# Altium PCB Power.PcbDoc
Units mm, origin at the board's own origin, x right, y up, seen from the top; angles counter-clockwise.
Board outline 80.25 x 60.25 mm, 2 copper layers (Top Layer, Bottom Layer); 57 components, 37 nets, 186 pads, 63 vias.
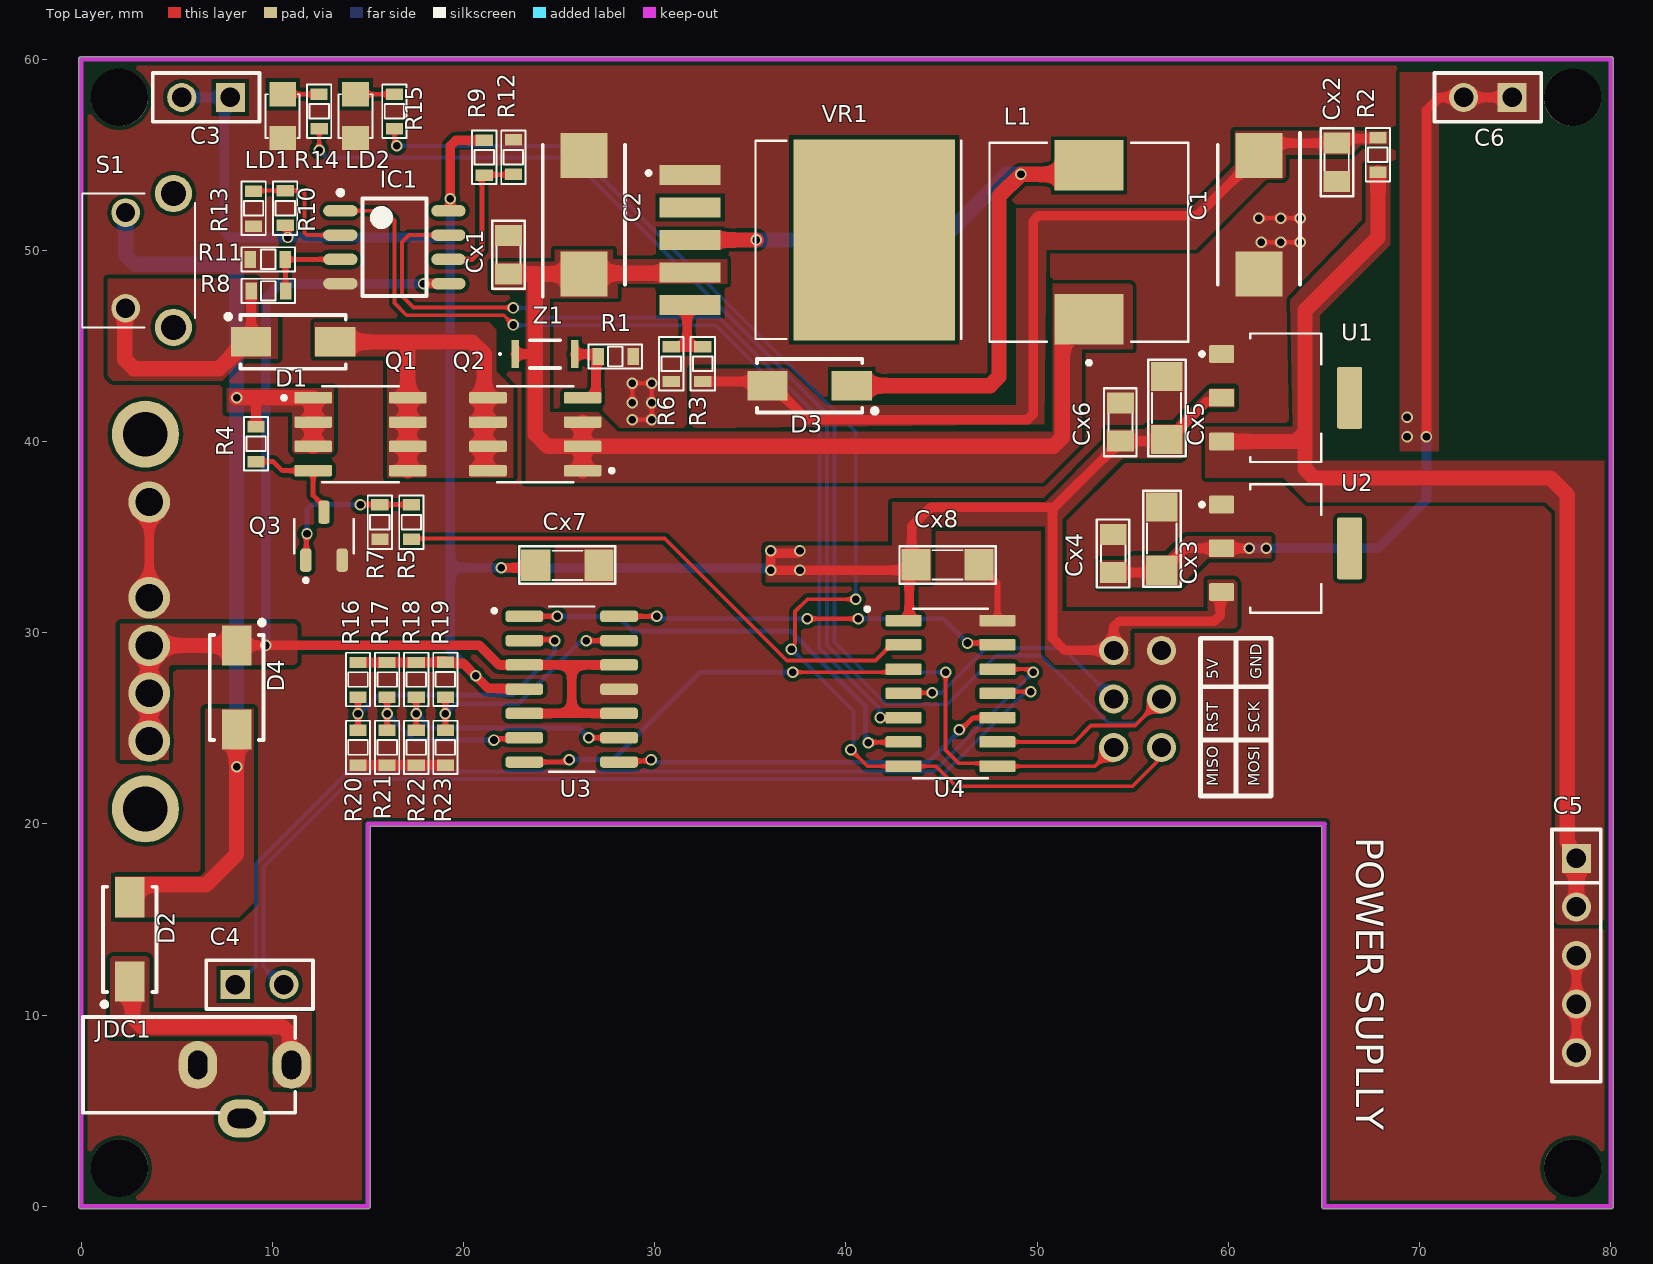
[diagram p0: Top Layer view]
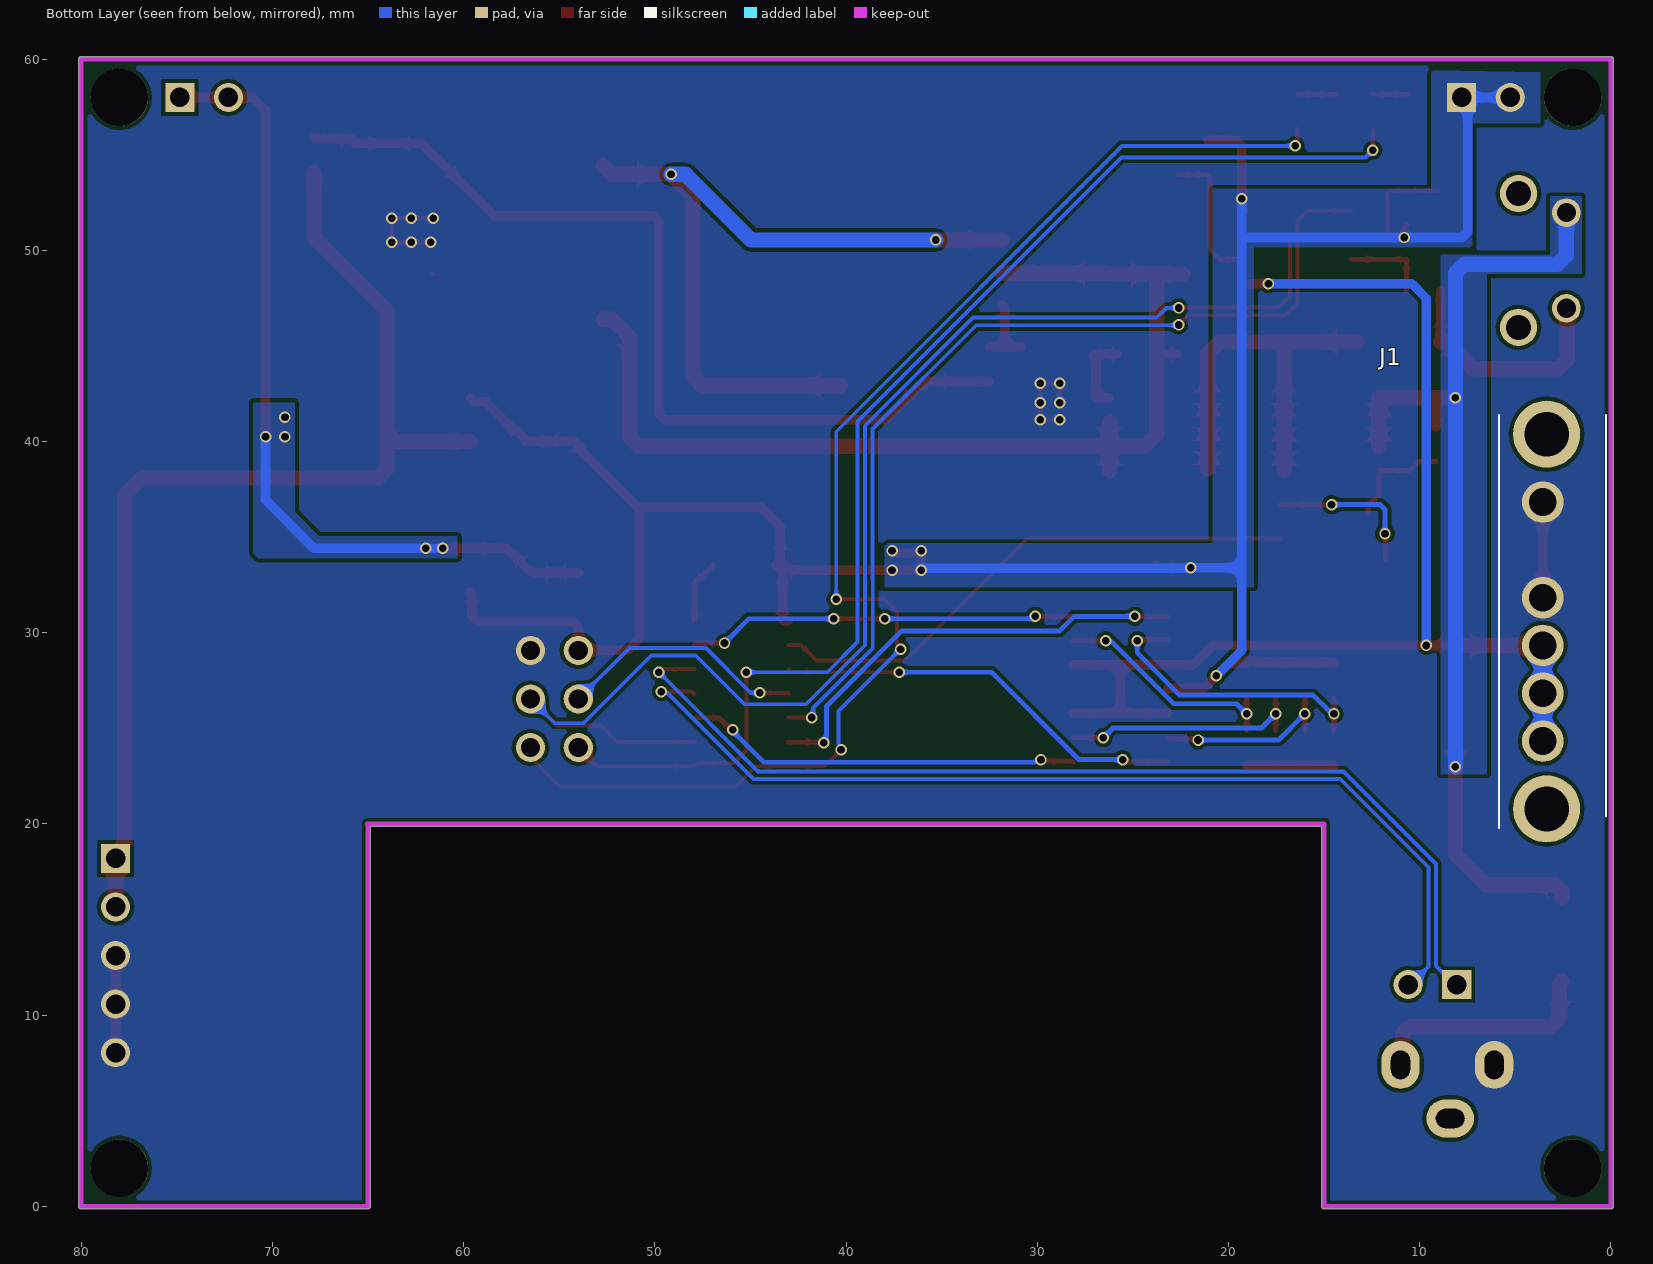
[diagram p1: Bottom Layer view, seen from below]
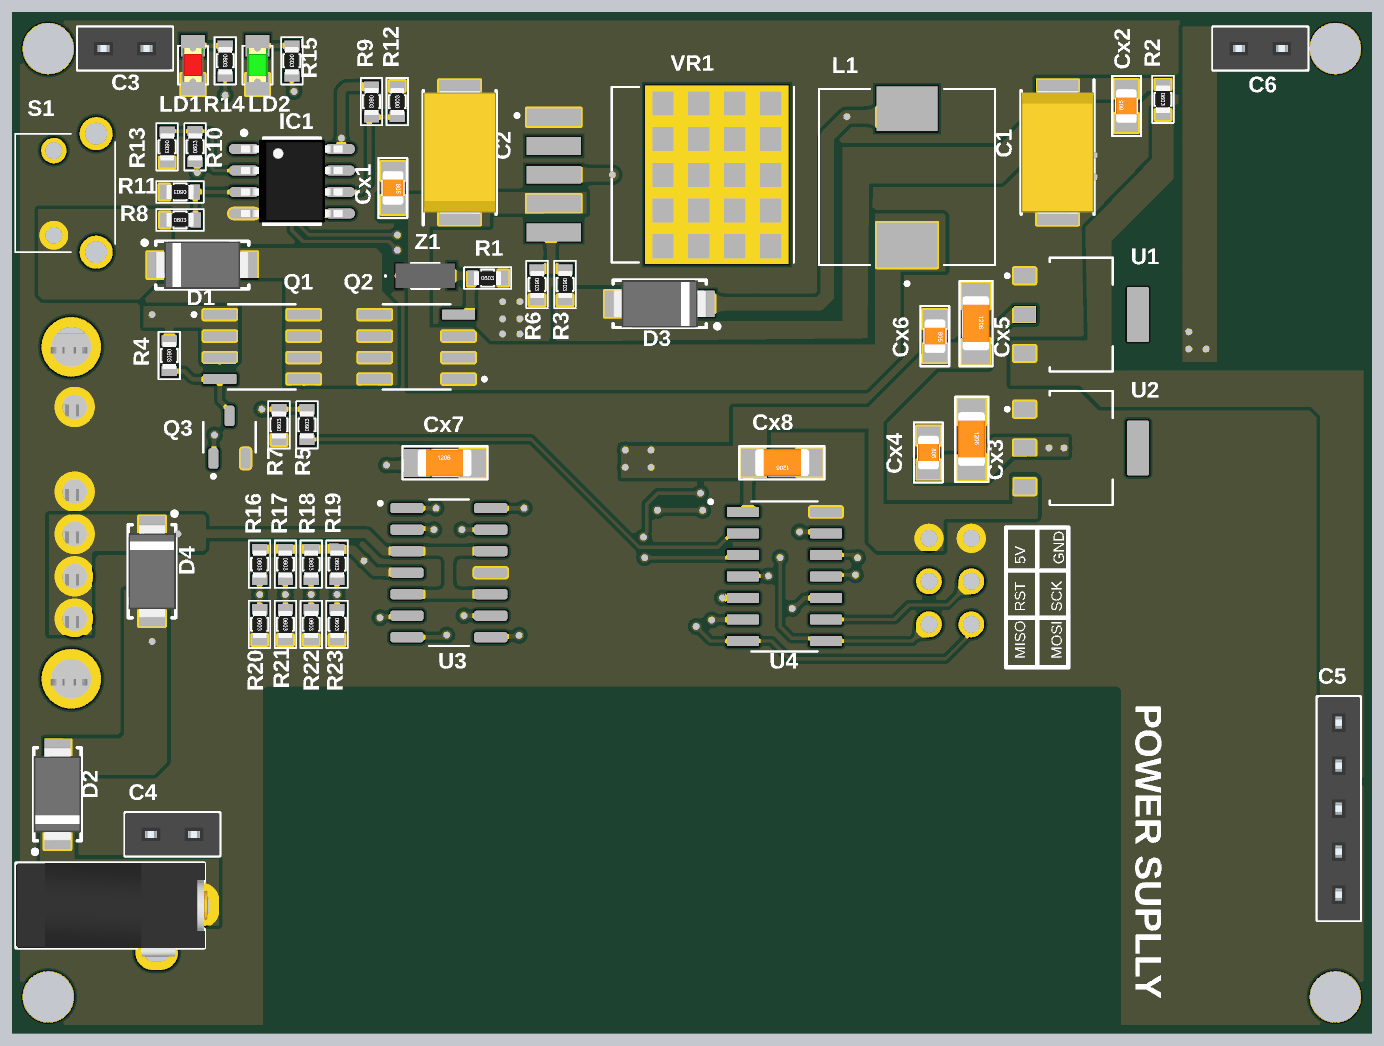
[diagram p2: 3D render of the assembled board from above, using the file's embedded part models]

## Layer stack, top to bottom
Top Solder: solder mask 0.0102, Solder Resist, Dk 3.5
Top Layer: signal copper 0.0356
Dielectric 1: dielectric 0.32, FR-4, Dk 4.8
Bottom Layer: signal copper 0.0356
Bottom Solder: solder mask 0.0102, Solder Resist, Dk 3.5

## Board outline
0,-0.127 cw(c0,0) -0.127,0 -0.127,60 cw(c0,60) 0,60.127 80,60.127 cw(c80,60) 80.127,60 80.127,0 cw(c80,0) 80,-0.127 65.024,-0.127 cw(c65.024,0) 65.012,-0.127 cw(c65,0) 64.873,0 64.873,19.873 15.127,19.873 15.127,0 cw(c15,0) 15,-0.127

## Design rules (kind name [scope] priority, off if disabled: settings)
Clearance [All] p1: gap=0.2 ignorepadtopadclearanceinfootprint=FALSE
PlaneClearance [All] p1: clearance=0.5
PlaneConnect [All] p1: planeconnectstyle=Direct reliefexpansion=0.508 reliefentries=4 reliefconductorwidth=0.254 reliefairgap=0.254
PolygonConnect [All] p1: connectstyle=Direct reliefconductorwidth=0.254 reliefentries=4 polygonreliefangle="90 Angle" airgapwidth=0.254
RoutingVias [All] p1: holewidth=0.4 width=0.6 viastyle="Through Hole" minholewidth=0.4 minwidth=0.6 maxholewidth=0.4 maxwidth=0.6
SolderMaskExpansion [All] p1: expansion=0.102 istentingtop=FALSE
Width [InNetClass('TP_PINT')] p1: maxlimit=0.8 minlimit=0.5 preferedwidth=0.6
Width 9V [InNetClass('9V')] p2: maxlimit=0.8 minlimit=0.5 preferedwidth=0.6
Width VCC [InNetClass('VCC')] p3: maxlimit=0.5 minlimit=0.3 preferedwidth=0.4
Width P_IN [InNetClass('P_INPUT')] p4: maxlimit=0.8 minlimit=0.5 preferedwidth=0.6
Width MCU [InNetClass('MCU')] p5: maxlimit=0.2 minlimit=0.2 preferedwidth=0.2
Width gnd [InNetClass('gnd')] p6: maxlimit=0.5 minlimit=0.2 preferedwidth=0.3
28 further rules are at their usual default settings.

## Classes and differential pairs
net class gnd: GND
net class VCC: +5 VCC
net class TP_PINT: TP_PINT1 TP_PINT3
net class P_INPUT: +BAT EX
net class MCU: CRL_P MISO MOSI/SDA R_SW_Power RST SCK/SCL TP1 TP_SW U_RX U_TX
net class 9V: +9 NetC1_1 NetC2_1 NetD3_1 NetQ2_4 TP_FB TP_PINT3

## Components (designator, comment, footprint, x,y, rotation, side; value= is the part's Value field where it differs from the comment)
C1 "100uf 16V" CAPPM7343X310N 61.595,51.868 r270 top
C2 "100uf 16V" CAPPM7343X310N 26.289,51.868 r90 top
C3 "JP2" JP2-C1T 7.8,58 r180 top locked
C4 "JP2" JP2-C1T 8.06,11.6 r0 top locked
C5 "JP5" JP5-C1T 78.2,18.2 r270 top locked
C6 "JP2" JP2-C1T 74.84,58 r180 top locked
Cx1 "104" CN-SMD-0805 22.352,49.768 r270 top value=33pF
Cx2 "104" CN-SMD-0805 65.659,54.61 r90 top value=33pF
Cx3 "22uf 10v" CN-SMD-1206 56.515,34.95 r270 top value=33pF
Cx4 "104" CN-SMD-0805 53.975,34.147 r270 top value=33pF
Cx5 "22uf 10v" CN-SMD-1206 56.769,41.783 r270 top value=33pF
Cx6 "104" CN-SMD-0805 54.356,41.021 r270 top value=33pF
Cx7 "22uf 10v" CN-SMD-1206 25.4,33.528 r0 top value=33pF
Cx8 "22uf 10v" CN-SMD-1206 45.339,33.553 r180 top value=33pF
D1 "D Schottky" SS34 11.09,45.212 r0 top
D2 "D Schottky" SS34 2.54,13.97 r90 top
D3 "D Schottky" SS34 38.1,42.926 r180 top
D4 "D Schottky" SS34 8.128,27.137 r270 top
IC1 "LM358" SO8 16.383,50.165 r0 top
J1 "9-1612503-1" 916125031 3.556,24.337 r90 bottom
JDC1 "Jac DC" DC3 11,7.4 r0 top locked
L1 "47uh 3A" IND_#B952AS-H-470M=P3 52.705,50.419 r90 top
LD1 "LED" LED-0805-Red 10.541,58.166 r270 top value="LED 3 - 5 ly 2 Colour" (schematic designator LED1)
LD2 "LED" LED-0805-Green 14.351,58.166 r270 top value="LED 3 - 5 ly 2 Colour" (schematic designator LED2)
Q1 "AO4407A" SOIC127P600X175-8N 14.605,40.386 r0 top
Q2 "AO4407A" SOIC127P600X175-8N 23.749,40.386 r180 top
Q3 "AO3400A" SOT95P280X125-3N 12.7,35.052 r90 top
R1 "10k" RES-SMD-0603 27.94,44.45 r0 top
R2 "0R" RES-SMD-0603 67.818,55.004 r270 top
R3 "62K" RES-SMD-0603 32.512,44.069 r270 top
R4 "10k" RES-SMD-0603 9.144,39.878 r270 top
R5 "220R" RES-SMD-0603 17.272,35.776 r90 top
R6 "10K" RES-SMD-0603 30.861,44.069 r270 top
R7 "10k" RES-SMD-0603 15.621,35.776 r90 top
R8 "10k" RES-SMD-0603 9.779,47.879 r0 top
R9 "180R" RES-SMD-0603 21.082,54.864 r270 top
R10 "1k2" RES-SMD-0603 10.668,52.197 r90 top
R11 "10k" RES-SMD-0603 9.779,49.53 r180 top
R12 "500R" RES-SMD-0603 22.606,54.864 r90 top
R13 "330R" RES-SMD-0603 9.017,52.197 r270 top
R14 "330R" RES-SMD-0603 12.446,57.277 r270 top
R15 "330R" RES-SMD-0603 16.383,57.277 r270 top
R16 "220R" RES-SMD-0603 14.478,27.557 r270 top
R17 "500R" RES-SMD-0603 16.002,27.557 r270 top
R18 "2k2" RES-SMD-0603 17.526,27.557 r270 top
R19 "220R" RES-SMD-0603 19.05,27.559 r270 top
R20 "570R" RES-SMD-0603 14.478,24.003 r270 top
R21 "1k5" RES-SMD-0603 16.002,24.003 r270 top
R22 "7k5" RES-SMD-0603 17.526,24.003 r270 top
R23 "1k" RES-SMD-0603 19.05,24.003 r270 top
S1 "MJTP1117" MJTP1117 2.326,51.974 r270 top
U1 "AMS1117-5.0" SOT229P700X180-4N 62.992,42.291 r270 top
U2 "AMS1117-3.3" SOT229P700X180-4N 62.992,34.417 r270 top
U3 "LM324DR" SOIC127P600X175-14N#1 25.654,27.051 r0 top
U4 "ATTINY44A-SSU" SOIC127P600X175-14N#2 45.466,26.83 r0 top
VR1 "XL6009" DPAK170P1435X465-6N 37.973,50.546 r0 top
Z1 "ZMM5V6" ZMM5V6 24.257,44.577 r180 top

## Footprints (in the part's own frame and the unit in brackets; to place one, negate y for a bottom-side part, rotate by r counter-clockwise, add the part's x,y. Pads: shape width x height; smd on the part's side, far side on the other; paste and mask are expansions set on the pad)
916125031 [mm]
  round 2.175 hole 1.45: 1(0,0) 2(2.5,0) 3(5,0) 4(7.5,0) 5(12.5,0)
  round 3.51 hole 2.34: MH1(-3.55,-0.2) MH2(16.05,-0.2)
  silkscreen extent -4.55,-3.3 17.05,2.3, body extent -4.75,-3.43 16.85,7.22, height 4.81
CAPPM7343X310N [mm]
  rect 2.35x2.45 smd: 1(-3.1,0) 2(3.1,0)
  silkscreen extent -4.28,-2.15 3.65,2.15, body extent -3.65,-2.15 3.65,2.15, height 3.1
CN-SMD-0805 [mm]
  rect 1.1x1.397 smd: 1(-1,0) 2(1,0)
  silkscreen extent -1.78,-0.86 1.78,0.84, body extent -1,-0.62 1,0.63, height 0.8
CN-SMD-1206 [mil]
  rect 60x65 smd: 1(-64,0) 2(66,0)
  silkscreen extent -98,-38 100,39, body extent -63,-31 63,32, height 40
DC3 [mm] "WR-DC_DC Power Jack_Right Angled_THT Center Pin ?1.0_Plug ID ?1.05_Plug OD ?3.5"
  oval 2x2.5 hole 1 slot 1.5 at 90 deg: 1(0,0) 2(-4.9,0)
  oval 2.5x2 hole 1 slot 1.5 at 0 deg: 3(-2.6,-2.8)
  silkscreen extent -10.9,-2.5 0.2,2.5, body extent -10.9,-3 0.4,2.5, height 7.81
DPAK170P1435X465-6N [mm]
  rect 3.21x1.05 smd: 1(-6.13,3.4) 2(-6.13,1.7) 3(-6.13,0) 4(-6.13,-1.7) 5(-6.13,-3.4)
  rect 8.46x10.53 smd paste-6: 6(3.5,0)
  silkscreen extent -8.4,-5.18 8.05,5.18
IND_#B952AS-H-470M=P3 [mm]
  rect 2.65x3.6 smd: 1(-4.025,0) 2(4.025,0)
  silkscreen extent -6.4,-5.2 5.2,5.2
JP2-C1T [mm] "2 row, straight, gold plating"
  rect 1.52x1.52 hole 1.02: 1(0,0)
  round 1.52 hole 1.02: 2(2.54,0)
  silkscreen extent -1.52,-1.27 4.06,1.27, body extent -1.52,-1.25 4.06,1.25, height 8.51
JP5-C1T [mm] "5 row, straight, gold plating"
  rect 1.52x1.52 hole 1.02: 1(0,0)
  round 1.52 hole 1.02: 2(2.54,0) 3(5.08,0) 4(7.62,0) 5(10.16,0)
  silkscreen extent -1.52,-1.27 11.68,1.27, body extent -1.52,-1.25 11.68,1.25, height 8.51
LED-0805-Green [mil]
  rect 50x55 smd: 1(0,0) 2(90,0)
  silkscreen extent 0,-35 90,35, body extent 5,-25 85,25, height 43
LED-0805-Red [mil]
  rect 50x55 smd: 1(0,0) 2(90,0)
  silkscreen extent 0,-35 90,35, body extent 5,-25 85,25, height 43
MJTP1117 [mm]
  round 1.5 hole 1: 1(0,0) 2(5,0)
  round 1.95 hole 1.3: 3(-1,2.5) 4(6,2.5)
  silkscreen extent -1,-2.27 6,3.63
RES-SMD-0603 [mm]
  rect 0.6x0.9 smd: 1(-0.889,0) 2(0.927,0)
  silkscreen extent -1.4,-0.64 1.4,0.64, body extent -0.8,-0.4 0.8,0.4, height 0.43
SO8 [mm] "SOIC, 8-Leads, Body 4.9x3.9mm, Pitch 1.27mm, IPC High Density"
  oval 1.8x0.6 smd: 1(-2.825,1.905) 2(-2.825,0.635) 3(-2.825,-0.635) 4(-2.825,-1.905) 5(2.825,-1.905) 6(2.825,-0.635) 7(2.825,0.635) 8(2.825,1.905)
  silkscreen extent -2.95,-2.55 1.68,2.98, body extent -2.99,-2.45 3,2.45, height 1.6
SOIC127P600X175-8N [mm]
  rrect25% 1.97x0.6 smd: 1(-2.475,1.905) 2(-2.475,0.635) 3(-2.475,-0.635) 4(-2.475,-1.905) 5(2.475,-1.905) 6(2.475,-0.635) 7(2.475,0.635) 8(2.475,1.905)
  silkscreen extent -4.1,-2.52 2,2.52
SOIC127P600X175-14N#1 [mm]
  rrect50% 1.97x0.6 smd: 1(-2.475,3.81) 2(-2.475,2.54) 3(-2.475,1.27) 4(-2.475,0) 5(-2.475,-1.27) 6(-2.475,-2.54) 7(-2.475,-3.81) 8(2.475,-3.81) 9(2.475,-2.54) 10(2.475,-1.27) 11(2.475,0) 12(2.475,1.27) 13(2.475,2.54) 14(2.475,3.81)
  silkscreen extent -4.15,-4.33 1.17,4.33
SOIC127P600X175-14N#2 [mm]
  rrect25% 1.9x0.6 smd: 1(-2.455,3.81) 2(-2.455,2.54) 3(-2.455,1.27) 4(-2.455,0) 5(-2.455,-1.27) 6(-2.455,-2.54) 7(-2.455,-3.81) 8(2.455,-3.81) 9(2.455,-2.54) 10(2.455,-1.27) 11(2.455,0) 12(2.455,1.27) 13(2.455,2.54) 14(2.455,3.81)
  silkscreen extent -4.45,-4.43 1.95,4.51
SOT95P280X125-3N [mm]
  rrect50% 1.21x0.59 smd: 1(-1.255,0.95) 2(-1.255,-0.95) 3(1.255,0)
  silkscreen extent -2.41,-1.55 0.9,1.55
SOT229P700X180-4N [mm]
  rrect15% 0.93x1.31 smd: 1(-2.29,-3.345) 2(0,-3.345) 3(2.29,-3.345)
  rrect15% 3.24x1.31 smd: 4(0,3.345)
  silkscreen extent -3.36,-4.47 3.36,1.86
SS34 [mm]
  rect 2.1x1.55 smd: 1(-2.2,0) 2(2.2,0)
  silkscreen extent -3.52,-1.4 2.75,1.45, body extent -2.75,-1.4 2.75,1.4, height 2.3
ZMM5V6 [mm]
  rect 0.39x1.45 smd: 1(1.555,0) 2(-1.555,0)
  silkscreen extent -0.8,-0.72 2.4,0.72, body extent -1.75,-0.72 1.75,0.72, height 1.7

## Part data
C1 C2: library part T495D107K010ATA100, "Capacitor Polarised", Manufacturer_Name=Kemet, Arrow Part Number=T495D107K010ATA100, Arrow Price/Stock=https://www.arrow.com/en/products/t495d107k010ata100/kemet-corporation, Datasheet Link=https://www.arrow.com/en/products/t495d107k010ata100/kemet-corporation, Height=3.1mm, Manufacturer_Part_Number=T495D107K010ATA100
C3 C4 C6: "WR-PHD 2.54 mm Angled Socket Header", Manufacturer="W¨¹rth Elektronik eiSos GmbH", partNo=613002143121, ComponentLink1 Description=Manufacturer, ComponentLink1URL=http://www.we-online.com, ComponentLink2 Description=Datasheet, ComponentLink2URL=http://katalog.we-online.de/em/datasheet/6130xx143121.pdf, Created by="Karrer Zheng", Created Date="29 March 2013", NoPins=02
C5: "WR-PHD 2.54 mm Angled Socket Header", Manufacturer="W¨¹rth Elektronik eiSos GmbH", partNo=613005143121, ComponentLink1 Description=Manufacturer, ComponentLink1URL=http://www.we-online.com, ComponentLink2 Description=Datasheet, ComponentLink2URL=http://katalog.we-online.de/em/datasheet/6130xx143121.pdf, Created by="Karrer Zheng", Created Date="29 March 2013", NoPins=05
Cx1 Cx2 Cx3 Cx4 Cx5 Cx6 Cx7 Cx8: library part CN
D1 D2 D3 D4: "Schottky Diode", Code_JEDEC=DO-214-AA, LatestRevisionDate=17-Jul-2002, LatestRevisionNote="Re-released for DXP Platform.", PackageDescription="DO-214-AA/SMB; 2 C-Bend Leads; Body 5.3 x 3.6 mm, inc. leads (LxW)", PackageReference=SMB, Published=8-Jun-2000, Publisher="Altium Limited"
IC1: "Low-Power Dual Operational Amplifier"
J1: "Connector", Manufacturer_Name="TE Connectivity", Mouser Part Number=571-9-1612503-1, Datasheet Link=https://www.te.com/commerce/DocumentDelivery/DDEController?Action=showdoc&DocId=Customer+Drawing%7F1612503%7FE%7Fpdf%7FEnglish%7FENG_CD_1612503_E.pdf%7F9-1612503-1, Height=4.8mm, Manufacturer_Part_Number=9-1612503-1, Mouser Price/Stock=https://www.mouser.co.uk/ProductDetail/TE-Connectivity/9-1612503-1/?qs=7ao7SdBpJfrtkNNaVbJcWQ%3D%3D
JDC1: library part DCIN, "Jac DC input"
L1: library part #B952AS-H-470M=P3, "Wire Wound Ferrite Inductor for Power Lines", Package=None, Availability=Unavailable, MP=#B952AS-H-470M=P3, Price=None
LD1 LD2: library part "LED SMD"
Q1 Q2: "P-Channel 30V 12A _Ta_ 3.1W _Ta_ Surface Mount 8-SOIC", Package="SOIC-8 Alpha &amp; Omega Semiconductor", Availability=Unavailable, MF="Alpha &", MP=AO4407A, Price=None, SnapEDA_Link=https://www.snapeda.com/parts/AO4407A/Alpha%20%26%20Omega%20Semiconductor%20Inc./view-part/492696/?ref=snap
Q3: "N-Channel 30V 5.7A _Ta_ 1.4W _Ta_ Surface Mount SOT-23-3L", Package="SOT-23 Alpha &amp; Omega Semiconductor", Availability=Unavailable, MF="Alpha &", MP=AO3400A, Price=None, SnapEDA_Link=https://www.snapeda.com/parts/AO3400A/Alpha%20%26%20Omega%20Semiconductor%20Inc./view-part/405248/?ref=snap
R1 R2 R3 R4 R5 R6 R7 R8 R9 R10 R11 R12 R13 R14 R15 R16 R17 R18 R19 R20 R21 R22 R23: library part Res-SMD, "Resistor", Manufacturer="Generic Components", Class=Passive, Published=08/06/2000, Publisher="Altium Hobart Technology Centre"
S1: "Switch", Manufacturer_Name=Apem, Mouser Part Number=642-MJTP1117, Datasheet Link=https://media.digikey.com/pdf/Data%20Sheets/APEM%20Components%20PDFs/MJTP%20Series-6MM.pdf, Height=4.3mm, Manufacturer_Part_Number=MJTP1117, Mouser Price/Stock=https://www.mouser.co.uk/ProductDetail/Apem/MJTP1117?qs=6hR9CYnVCPAeQNDPI%2FtCng%3D%3D
U1: "Sot223/Pkg 1-Amp 5-Volt Low Drop Out Voltage Regulatator", Package=None, Availability=Unavailable, MF="Advanced Monolithic Systems", MP=AMS1117-5.0, Price=None, SnapEDA_Link=https://www.snapeda.com/parts/AMS1117-5.0/Advanced%20Monolithic%20Systems/view-part/184433/?ref=snap
U2: library part AMS1117-5.0, "Sot223/Pkg 1-Amp 5-Volt Low Drop Out Voltage Regulatator", Package=None, Availability=Unavailable, MF="Advanced Monolithic Systems", MP=AMS1117-5.0, Price=None, SnapEDA_Link=https://www.snapeda.com/parts/AMS1117-5.0/Advanced%20Monolithic%20Systems/view-part/184433/?ref=snap
U3: "4-Channel industry standard operational amplifier 14-SOIC 0 to 70", Package="SOIC-14 Texas Instruments", Arrow_Electronics-Purchase-URL=https://snapeda.com/shop?store=Arrow+Electronics&id=1818, Availability=Good, DigiKey-Purchase-URL=https://snapeda.com/shop?store=DigiKey&id=1818, MF="Texas Instruments", Mouser-Purchase-URL=https://snapeda.com/shop?store=Mouser&id=1818, MP=LM324DR, Price=None, SnapEDA_Link=https://www.snapeda.com/parts/LM324DR/Texas%20Instruments/view-part/1818/?ref=snap, Texas_Instruments-Purchase-URL=https://snapeda.com/shop?store=Texas+Instruments&id=1818
U4: "AVR AVRÂ® ATtiny Microcontroller IC 8-Bit 20MHz 4KB (2K x 16) FLASH 14-SOIC", Package="SOIC-14 Microchip", Availability=Unavailable, MF=Microchip, MP=ATTINY44A-SSU, Price=None, SnapEDA_Link=https://www.snapeda.com/parts/ATTINY44A-SSU/Microchip/view-part/666505/?ref=snap
VR1: "The XL6009 regulator is a wide input range, current mode, DC/DC converter which is capable of generating either positive or negative output voltages.", Package="Package Analog Devices", Availability=Unavailable, MF=XLSEMI, MP=XL6009, Price=None, SnapEDA_Link=https://www.snapeda.com/parts/XL6009/XLSEMI/view-part/2888428/?ref=snap
Z1: "Zener Diode", Manufacturer_Name=Lite-On, Datasheet Link=https://4donline.ihs.com/images/VipMasterIC/IC/LITE/LITES00631/LITES00631-1.pdf?hkey=EF798316E3902B6ED9A73243A3159BB0, Height=1.6mm, Manufacturer_Part_Number=ZMM5V6

## Free pads (board coordinates)
  round 3 hole 3: 21(2,2) 22(2,58) 23(78,58) 24(78,2)
  round 1.524 hole 1: 25(54,26.54) 27(56.5,26.54) 28(56.5,24) 29(54,29.08) 30(56.5,29.08) ""(54,24)

## Via types
v1: diameter 0.6, hole 0.4, Top Layer to Bottom Layer, tented both sides, 63 vias

## Nets (pads, with @x,y where several pads share a name; then routed paths per layer and width w, separated by ;. In a path a pad name is that pad's centre, name@x,y a point inside that pad or via, vN(x,y) a via of type N, cw(c..) or ccw(c..) an arc to the next point about the centre after c; other vN are vias at no path point)
+5: C3.1 C3.2 Cx5.2 Cx6.2 Cx7.1 Cx8.2 IC1.8 pad.29 R9.1 R10.1 R16.1 R17.1 R18.1 R19.1 U1.2 U2.3 U3.4 U4.1 | length 134.2
  Top Layer w0.3: R10.1 10.795,51.181 v1(10.795,50.673)
  Top Layer w0.5: R16.1 14.479,28.447 18.542,28.447 18.619,28.524 R19.1@19.05,28.524 ; R19.1 19.1,28.448 19.15,28.398 19.989,28.398 v1(20.637,27.75) 21.286,27.101 23.129,27.101 U3.4 ; IC1.8 19.258,52.07 19.304,52.116 v1(19.304,52.705) 19.304,55.46 19.597,55.753 R9.1 ; v1(21.971,33.401) 23.647,33.401 Cx7.1 ; v1(37.592,34.29) 37.465,34.163 36.068,34.163 v1(36.068,33.274) v1(37.592,33.274) 42.926,33.274 43.18,33.528 Cx8.2@43.307,33.401 ; U4.1 43.257,30.64 43.307,30.69 43.307,33.198 Cx8.2 43.434,33.782 43.434,35.56 44.45,36.576 50.8,36.576 50.8,29.718 51.438,29.08 pad.29 54,30.314 54.293,30.607 59.27,30.607 59.563,30.9 59.563,32.043 U2.3 ; 50.8,36.465 53.908,39.572 53.908,39.721 54.208,40.021 56.769,40.021 Cx5.2@56.769,40.043 ; Cx5.2 57.281,40.619 57.383,40.619 58.84,42.076 59.432,42.076 U1.2
  Bottom Layer w0.5: C3.2 C3.1 7.493,57.693 7.493,50.966 7.786,50.673 19.177,50.673 19.304,50.8 ; v1(19.304,52.705) 19.304,33.401 ; v1(20.637,27.75) 19.304,29.083 19.304,33.401 ; v1@21.971,33.382 v1@36.068,33.382 ; v1(21.971,33.401) 19.304,33.401
  other v1: 36.068,34.29
+9: C5.1 C5.2 R2.2 U1.3 | length 57.6
  Top Layer w0.8: U1.3 63.539,40.001 64.008,40.47 ; R2.2 67.818,50.673 64.008,46.863 64.008,40.47 ; C5.1@77.978,18.002 78.2,17.78 C5.2 ; C5.1 77.84,18.56 77.84,18.913 77.724,19.029 77.724,37.211 76.835,38.1 64.477,38.1 64.008,38.569 64.008,40.47
+BAT: D4.1 IC1.5 J1.1 J1.2 J1.3 U3.3 U3.5 U3.10 U3.12 | length 70.5
  Top Layer w0.5: D4.1 v1(9.652,29.337) 20.828,29.337 21.844,28.321 U3.3 25.654,28.321 ; v1(17.907,48.26) IC1.5 ; U3.5 25.654,25.781 ; U3.10 25.654,25.781 ; U3.12 25.654,28.321 ; 25.654,25.781 25.654,28.321
  Top Layer w0.8: J1.1 J1.2 J1.3 D4.1
  Bottom Layer w0.5: v1(9.652,29.337) 9.652,47.498 10.414,48.26 v1(17.907,48.26)
  Bottom Layer w0.8: J1.1 J1.2 J1.3
CRL_P: R5.1 U4.2 | length 28.7
  Top Layer w0.2: R5.1 17.31,34.925 30.523,34.925 36.9,28.548 41.539,28.548 42.361,29.37 U4.2
EX: D2.1 JDC1.1 | length 12.1
  Top Layer w0.8: D2.1 2.686,11.624 2.686,9.867 3.154,9.398 10.531,9.398 10.884,9.045 10.884,7.616 JDC1.1@11,7.5
GND: C1.2 C2.2 C5.3 C5.4 C5.5 Cx1.1 Cx2.1 Cx3.1 Cx4.1 Cx5.1 Cx6.1 Cx7.2 Cx8.1 IC1.4 J1.4 J1.5 JDC1.2 LD1.2 LD2.2 pad.30 Q3.2 R1.2 R6.2 R7.1 R11.2 R12.2 R13.2 R20.2 R21.2 R22.2 R23.2 U1.1 U2.1 U3.11 U4.14 VR1.1 | length 28.5
  Top Layer w0.2: v1(28.829,41.148) v1(29.845,41.148) v1(29.845,42.037) v1(29.845,43.053) v1(28.829,43.053) ; v1(28.829,42.037) v1(28.829,43.053) ; v1@28.867,43.091 v1(28.829,43.053) ; C1.2 C1.2@61.645,48.768 ; v1(61.595,51.689) v1(62.738,51.689) v1(63.754,51.689) v1(63.754,50.419) v1(62.738,50.419) v1(61.722,50.419)
  Top Layer w0.3: Cx8.1 46.965,33.49 47.577,32.878 47.64,32.878 47.921,32.597 U4.14
  Top Layer w0.5: J1.4 J1.5 ; R20.2 R23.2 ; C5.5 C5.4 C5.3
MISO: pad. R14.2 U4.8 | length 65.6
  Top Layer w0.2: v1(12.446,55.245) R14.2 ; v1(45.212,27.94) 45.212,23.876 45.915,23.173 47.767,23.173 U4.8 53.02,23.02 pad.
  Bottom Layer w0.2: v1(12.446,55.245) 12.827,54.864 25.596,54.864 39.406,41.054 39.406,32.508 39.405,32.507 39.405,29.513 40.978,27.94 v1(45.212,27.94)
MOSI/SDA: pad.28 R15.2 U4.7 | length 70.2
  Top Layer w0.2: R15.2 16.383,55.581 16.5,55.464 v1(16.51,55.464) ; v1(37.149,29.148) 37.149,29.256 37.338,29.445 37.338,31.115 37.973,31.75 v1(40.513,31.75) ; v1(40.259,23.876) 41.115,23.02 U4.7 44.711,23.02 45.759,21.971 54.991,21.971 56.247,23.227 56.247,23.747 pad.28
  Bottom Layer w0.2: v1(16.51,55.464) 25.562,55.464 40.513,40.513 v1(40.513,31.75) ; v1(37.149,29.148) 40.386,25.91 40.386,24.193 40.336,24.143 40.336,23.953 v1(40.259,23.876)
NetC1_1: C1.1 Cx2.2 D3.2 R2.1 R3.2 | length 48.1
  Top Layer w0.5: R3.2 35.684,43.142 D3.2 36.175,42.926 37.953,41.148 49.491,41.148 49.784,41.441 49.784,51.523 50.077,51.816 58.393,51.816 60.62,54.043 61.545,54.968 C1.1 62.237,55.61 Cx2.2 65.892,55.844 67.768,55.844 R2.1
NetC2_1: C2.1 Cx1.2 L1.1 Q2.1 Q2.2 Q2.3 VR1.4 Z1.1 | length 56.6
  Top Layer w0.5: Z1.1 23.685,44.577 23.749,44.514
  Top Layer w0.8: Cx1.2 23.876,48.768 ; Q2.1 Q2.2 ; Q2.3 Q2.2 ; VR1.4 31.804,48.807 26.328,48.807 C2.1 23.876,48.768 ; L1.1 52.233,46.394 51.308,45.469 51.308,40.22 50.839,39.751 Q2.2 ; 23.876,48.768 23.749,48.641 23.749,44.514 23.749,40.386 24.384,39.751 Q2.2
NetD3_1: D3.1 L1.2 VR1.3 | length 41.4
  Top Layer w0.8: VR1.3 v1(35.306,50.546) ; D3.1 47.537,42.926 48.006,43.395 48.006,52.832 v1(49.149,53.975) 52.236,53.975 L1.2
  Bottom Layer w0.8: v1(35.306,50.546) 44.958,50.546 48.387,53.975 v1(49.149,53.975)
NetIC1_3: IC1.3 R8.2 R11.1 | length 4.6
  Top Layer w0.254: R8.2 10.687,47.898 10.687,49.511 R11.1 IC1.3
NetIC1_6: IC1.6 R9.2 R12.1 | length 7.4
  Top Layer w0.254: IC1.6 20.447,49.53 20.955,50.038 20.955,53.81 21.101,53.956 22.587,53.956 R12.1
NetLED1_1: LD1.1 R14.1 | length 1.9
  Top Layer w0.254: LD1.1 R14.1
NetLED2_1: LD2.1 R15.1 | length 2
  Top Layer w0.254: LD2.1 R15.1
NetQ1_4: Q1.4 Q3.3 R4.2 | length 5.6
  Top Layer w0.254: R4.2 10.048,38.951 10.518,38.481 Q1.4 12.13,37.187 12.7,36.617 Q3.3
NetQ2_4: Q2.4 R1.1 Z1.2 | length 4.1
  Top Layer w0.5: Z1.2 27.001,44.577 R1.1@27.051,44.527 ; Q2.4 26.874,42.291 26.924,42.341 26.924,44.173 27.001,44.25 27.001,44.4 R1.1
NetQ3_1: Q3.1 R5.2 R7.2 | length 8.2
  Top Layer w0.254: Q3.1 11.78,33.828 11.78,35.148 v1(11.811,35.179) ; v1(14.605,36.703) R7.2 R5.2
  Bottom Layer w0.254: v1(11.811,35.179) 11.811,36.449 12.065,36.703 v1(14.605,36.703)
R_SW_Power: IC1.1 U4.5 | length 49.9
  Top Layer w0.2: IC1.1 15.875,52.07 16.383,51.562 16.383,47.244 17.018,46.609 22.098,46.609 v1(22.606,46.101) ; v1(41.798,25.566) 41.801,25.563 43.008,25.563 U4.5
  Bottom Layer w0.2: v1(22.606,46.101) 22.625,46.082 33.187,46.082 38.606,40.663 38.606,32.839 38.605,32.838 38.605,29.182 41.721,26.066 41.721,25.643 v1(41.798,25.566)
RST: pad.25 U4.4 | length 13.1
  Top Layer w0.2: U4.4 43.041,26.859 v1(44.515,26.859)
  Bottom Layer w0.2: v1(44.515,26.859) 44.98,26.859 47.331,29.21 51.33,29.21 pad.25
SCK/SCL: IC1.7 pad.27 U4.9 | length 73.3
  Top Layer w0.2: IC1.7 17.145,50.8 16.783,50.438 16.783,47.606 17.38,47.009 22.587,47.009 v1(22.606,46.99) ; U4.9 51.961,24.29 52.817,25.146 55.106,25.146 pad.27
  Bottom Layer w0.2: v1(22.606,46.99) 23.241,46.99 23.749,46.482 33.353,46.482 39.006,40.829 39.006,32.674 39.005,32.672 39.005,29.348 42.093,26.259 45.309,26.259 47.86,28.81 50.184,28.81 53.721,25.273 55.233,25.273 pad.27
TP1: IC1.2 R10.2 R13.1 | length 6.7
  Top Layer w0.2: R13.1 9.055,53.124 R10.2 11.567,53.124 11.684,53.007 11.684,50.917 11.801,50.8 IC1.2
TP_FB: R3.1 R6.1 VR1.5 | length 3.9
  Top Layer w0.5: R6.1 31.686,44.958 ; VR1.5 31.686,46.989 31.686,44.958 ; R3.1 31.686,44.958
TP_PINT1: D2.2 D4.2 Q1.1 Q1.2 Q1.3 R4.1 S1.1 | length 55.5
  Top Layer w0.5: R4.1 9.144,42.291
  Top Layer w0.8: D2.2 2.54,16.445 2.915,16.82 6.533,16.82 8.128,18.415 v1(8.128,22.987) D4.2 ; v1(8.128,42.291) 9.144,42.291 Q1.1 Q1.2 Q1.3
  Bottom Layer w0.8: S1.1 2.326,49.745 2.795,49.276 7.659,49.276 8.128,48.807 v1(8.128,42.291) v1(8.128,22.987)
TP_PINT3: D1.2 Q1.5 Q1.6 Q1.7 Q1.8 Q2.5 Q2.6 Q2.7 Q2.8 | length 20.9
  Top Layer w0.8: D1.2 16.869,45.212 ; Q1.5 Q1.7 Q1.8 17.08,45.001 16.869,45.212 ; Q2.8@21.082,38.581 21.082,39.751 21.082,41.021 21.082,42.291 21.082,44.577 20.447,45.212 16.869,45.212
TP_SW: D1.1 R8.1 S1.2 | length 12.8
  Top Layer w0.5: D1.1 R8.1
  Top Layer w0.8: S1.2 2.286,46.934 2.286,44.284 2.755,43.815 7.218,43.815 8.615,45.212 D1.1
U_RX: C4.1 U4.12 | length 53.6
  Top Layer w0.2: U4.12 49.624,28.1 v1(49.784,27.94)
  Bottom Layer w0.2: C4.1@8.053,11.484 9.144,12.575 9.144,17.907 13.989,22.752 44.596,22.752 v1(49.784,27.94)
U_TX: C4.2 U4.11 | length 52.4
  Top Layer w0.2: U4.11 47.954,26.797 48.081,26.924 v1(49.657,26.924)
  Bottom Layer w0.2: C4.2@10.593,11.484 9.544,12.534 9.544,17.741 14.155,22.352 44.831,22.352 49.326,26.847 49.58,26.847 v1(49.657,26.924)
V1: U3.1 U4.6 | length 23.6
  Top Layer w0.254: U3.1 v1(24.892,30.861) ; v1(41.171,24.257) 41.187,24.273 42.995,24.273 U4.6
  Bottom Layer w0.254: v1(24.892,30.861) 28.067,30.861 28.829,30.099 37.084,30.099 41.021,26.162 41.021,24.5 41.171,24.351 v1(41.171,24.257)
V2: U3.7 U4.3 | length 21.8
  Top Layer w0.2: v1(37.211,27.94) 42.851,27.94 U4.3
  Top Layer w0.254: U3.7 25.4,23.241 v1(25.527,23.368)
  Bottom Layer w0.254: v1(25.527,23.368) 27.813,23.368 32.385,27.94 v1(37.211,27.94)
V3: U3.8 U4.10 | length 20.9
  Top Layer w0.254: U3.8 28.184,23.296 29.748,23.296 v1(29.803,23.352) ; v1(45.931,24.935) 46.017,24.935 46.642,25.56 U4.10
  Bottom Layer w0.254: v1(29.803,23.352) 29.869,23.286 30.069,23.286 30.125,23.23 44.312,23.23 45.931,24.849 v1(45.931,24.935)
V4: U3.14 U4.13 | length 20.4
  Top Layer w0.254: U3.14 v1(30.099,30.861) ; v1(37.973,30.734) v1(40.64,30.734) ; v1(46.355,29.464) 47.827,29.464 U4.13
  Bottom Layer w0.254: v1(30.099,30.861) 30.226,30.734 v1(37.973,30.734) ; v1(40.64,30.734) 45.085,30.734 v1(46.355,29.464)
VCC: C6.1 C6.2 Cx3.2 Cx4.2 U2.2 | length 43.1
  Top Layer w0.5: Cx4.2 56.388,33.147 Cx3.2 56.578,33.274 57.721,34.417 U2.2 v1(61.087,34.417) ; v1(70.358,40.259) 70.358,57.326 71.032,58 C6.1
  Bottom Layer w0.5: v1(61.087,34.417) v1(61.976,34.417) 67.818,34.417 70.358,36.957 v1(70.358,40.259)
  other v1: 69.342,40.259 69.342,41.275
Vref1: R16.2 R20.1 U3.2 | length 15.6
  Top Layer w0.254: R20.1 v1(14.478,25.761) R16.2 ; U3.2 23.239,29.651 24.705,29.651 v1(24.765,29.591)
  Bottom Layer w0.254: v1(14.478,25.761) 14.572,25.761 14.745,25.934 14.758,25.934 15.567,26.743 22.552,26.743 24.765,28.956 v1(24.765,29.591)
Vref2: R17.2 R21.1 U3.6 | length 9.5
  Top Layer w0.254: R21.1 v1(16.002,25.761) R17.2 ; v1(21.59,24.392) 21.649,24.452 23.12,24.452 U3.6
  Bottom Layer w0.254: v1(16.002,25.761) 17.371,24.392 v1(21.59,24.392)
Vref3: R18.2 R22.1 U3.9 | length 12.9
  Top Layer w0.254: R22.1 v1(17.526,25.761) R18.2 ; v1(26.543,24.511) U3.9
  Bottom Layer w0.254: v1(17.526,25.761) 18.268,25.019 26.035,25.019 v1(26.543,24.511)
Vref4: R19.2 R23.1 U3.13 | length 12.4
  Top Layer w0.254: R23.1 v1(19.05,25.762) R19.2 ; v1(26.416,29.591) U3.13
  Bottom Layer w0.254: v1(19.05,25.762) 19.577,26.289 22.86,26.289 26.096,29.525 26.35,29.525 v1(26.416,29.591)
pads on no net: J1.MH1 J1.MH2 JDC1.3 S1.3 S1.4 U1.4 U2.4 VR1.2 VR1.6

## Polygon pours and split planes (outlines as drawn)
GND on Top Layer "GND_L01_P023" (solid, remove dead copper, pour order 23): 0,-0.127 cw(c0,0) -0.127,0 -0.127,60 cw(c0,60) 0,60.127 80,60.127 cw(c80,60) 80.127,60 80.127,0 cw(c80,0) 80,-0.127 65.024,-0.127 cw(c65.024,0) 65.012,-0.127 cw(c65,0) 64.873,0 64.873,19.873 15.127,19.873 15.127,0 cw(c15,0) 15,-0.127
NetC1_1 on Top Layer "NETC1_1_L01_P018" (solid, remove dead copper, pour order 18): 31.877,43.815 31.877,40.767 31.939,40.705 50.363,40.897 50.475,50.038 58.293,50.038 61.976,53.721 62.992,53.721 62.992,54.991 66.421,54.991 66.929,55.499 68.453,55.499 68.453,56.261 60.325,56.261 60.325,54.483 58.039,52.197 48.895,52.197 48.895,41.91 38.989,41.91 36.957,43.797 36.957,43.815
NetC2_1 on Top Layer "NETC2_1_L01_P017" (solid, remove dead copper, pour order 17): 21.463,49.403 21.463,48.006 21.59,47.879 23.241,47.879 23.241,37.846 50.292,37.846 52.324,39.878 52.324,44.831 54.991,44.831 54.991,48.133 54.864,48.26 50.8,48.26 50.8,40.513 49.911,40.513 28.067,40.513 27.051,41.529 24.511,41.529 24.511,47.498 28.067,47.498 28.067,48.26 33.782,48.26 33.782,49.53 27.813,49.53 27.813,50.038 24.765,50.038 24.765,49.403
TP_PINT3 on Top Layer "TP_PINT3_L01_P015" (solid, remove dead copper, pour order 15): 12.192,44.45 16.002,44.45 16.002,38.1 22.606,38.1 22.606,42.799 21.717,43.688 21.717,45.847 21.336,46.228 14.478,46.228 12.192,46.228
TP_PINT1 on Top Layer "TP_PINT1_L01_P014" (solid, remove dead copper, pour order 14): 7.62,42.799 7.62,41.529 11.049,41.529 11.049,39.497 11.176,39.37 13.081,39.37 13.208,39.497 13.208,42.799
TP_SW on Top Layer "TP_SW_L01_P013" (solid, remove dead copper, pour order 13): 1.397,43.434 1.651,43.18 7.366,43.18 8.509,44.323 10.287,44.323 10.287,46.482 9.271,46.482 9.271,48.387 9.144,48.514 7.874,48.514 1.397,48.514
TP_PINT1 on Top Layer "TP_PINT1_L01_P011" (solid, remove dead copper, pour order 11): 1.778,15.113 8.255,15.113 9.017,15.875 9.017,26.035 6.477,26.035 6.477,17.526 6.223,17.272 1.778,17.272
EX on Top Layer "EX_L01_P010" (solid, remove dead copper, pour order 10): 10.033,6.223 12.065,6.223 12.065,10.16 3.556,10.16 3.556,12.954 3.429,13.081 1.651,13.081 1.524,12.954 1.524,8.89 9.906,8.89 10.033,8.763
+BAT on Top Layer "+BAT_L01_P009" (solid, remove dead copper, pour order 9): 2.032,23.368 4.572,23.368 4.572,28.194 4.699,28.321 11.176,28.321 11.303,28.448 11.303,30.353 11.176,30.48 2.032,30.48
+5 on Top Layer "+5_L01_P008" (solid, remove dead copper, pour order 8): 35.814,32.639 42.672,32.639 42.672,34.544 42.227,34.544 35.814,34.544
+5 on Top Layer "+5_L01_P004" (solid, remove dead copper, pour order 4): 60.325,42.799 60.325,41.783 58.928,41.783 57.658,40.513 57.658,39.243 57.531,39.116 54.483,39.116 51.308,35.941 51.308,31.115 58.928,31.115 58.928,32.766 60.325,32.766 60.452,32.639 60.452,30.353 60.325,30.226 54.991,30.226 54.864,30.099 54.864,28.321 50.927,28.321 50.419,28.829 50.419,35.56 44.45,35.56 44.45,32.639 42.418,32.639 42.418,36.83 50.419,36.83 53.594,40.005 53.594,40.64 55.626,40.64 55.88,40.894 57.277,40.894 57.277,41.021 59.055,42.799
VCC on Top Layer "VCC_L01_P002" (solid, pour order 2): 53.213,33.782 53.213,32.385 57.404,32.385 58.928,33.909 62.23,33.909 62.23,35.052 57.785,35.052 56.769,34.036 54.991,34.036 54.61,33.782 54.356,33.782
VCC on Top Layer "VCC_L01_P001" (solid, pour order 1): 76.327,59.309 76.327,56.642 70.993,56.642 70.993,56.388 70.993,39.497 68.961,39.497 68.961,59.309
+9 on Top Layer "+9_L01_P000" (solid, pour order 0): 67.183,54.483 67.183,51.509 63.232,47.43 63.368,40.767 58.801,40.767 58.801,38.1 62.865,38.1 64.135,36.83 76.581,36.83 77.089,36.322 77.089,14.859 77.216,14.732 79.375,14.732 79.883,15.24 79.883,38.862 79.756,38.989 64.77,38.989 64.77,46.609 68.453,50.292 68.453,54.483
GND on Bottom Layer "GND_L02_P022" (solid, remove dead copper, pour order 22): 0,-0.127 cw(c0,0) -0.127,0 -0.127,60 cw(c0,60) 0,60.127 80,60.127 cw(c80,60) 80.127,60 80.127,0 cw(c80,0) 80,-0.127 65.024,-0.127 cw(c65.024,0) 65.012,-0.127 cw(c65,0) 64.873,0 64.873,19.873 15.127,19.873 15.127,0 cw(c15,0) 15,-0.127
+5 on Bottom Layer "+5_L02_P006" (solid, pour order 6): 3.683,59.309 3.683,56.642 7.239,56.642 7.239,50.292 7.366,50.165 18.669,50.165 18.669,32.385 37.973,32.385 37.973,34.544 37.846,34.671 20.828,34.671 20.828,53.213 9.398,53.213 9.398,55.626 9.398,56.769 9.398,59.436
VCC on Bottom Layer "VCC_L02_P005" (solid, remove dead copper, pour order 5): 60.325,35.052 60.325,33.909 70.739,33.909 70.993,34.163 70.993,42.037 68.834,42.037 68.834,36.322 67.564,35.052
TP_PINT1 on Bottom Layer "TP_PINT1_L02_P012" (solid, remove dead copper, pour order 12): 1.524,52.832 1.524,48.768 6.477,48.768 6.477,22.606 8.89,22.606 8.89,49.784 3.175,49.784 3.175,52.832

## Keep-outs
Keep-Out Layer:
  lines w0.254: 20,20 65.024,20 15,20 15,0 0,0 0,60 80,60 80,0 65.024,0 ; 65,0 65,20

## Silkscreen, mask and mechanical layers (free items; w line width, h text height)
Top Overlay:
  lines w0.254: 58.547,24.384 62.23,24.384 ; 58.547,27.178 62.23,27.178 ; 60.389,21.463 60.389,29.718 ; 58.547,21.463 58.547,29.718 62.23,29.718 62.23,21.463 58.547,21.463
  text "5V" at 59.679,27.559 h1 r90
  text "GND" at 61.965,27.559 h1 r90
  text "RST" at 59.679,24.765 h1 r90
  text "SCK" at 61.838,24.765 h1 r90
  text "MISO" at 59.679,21.971 h1 r90
  text "MOSI" at 61.838,21.971 h1 r90
  text "POWER SUPLLY" at 66.196,19.304 h2.5 r270